# EAGLE board tic_tac_toe (EAGLE 6.3)
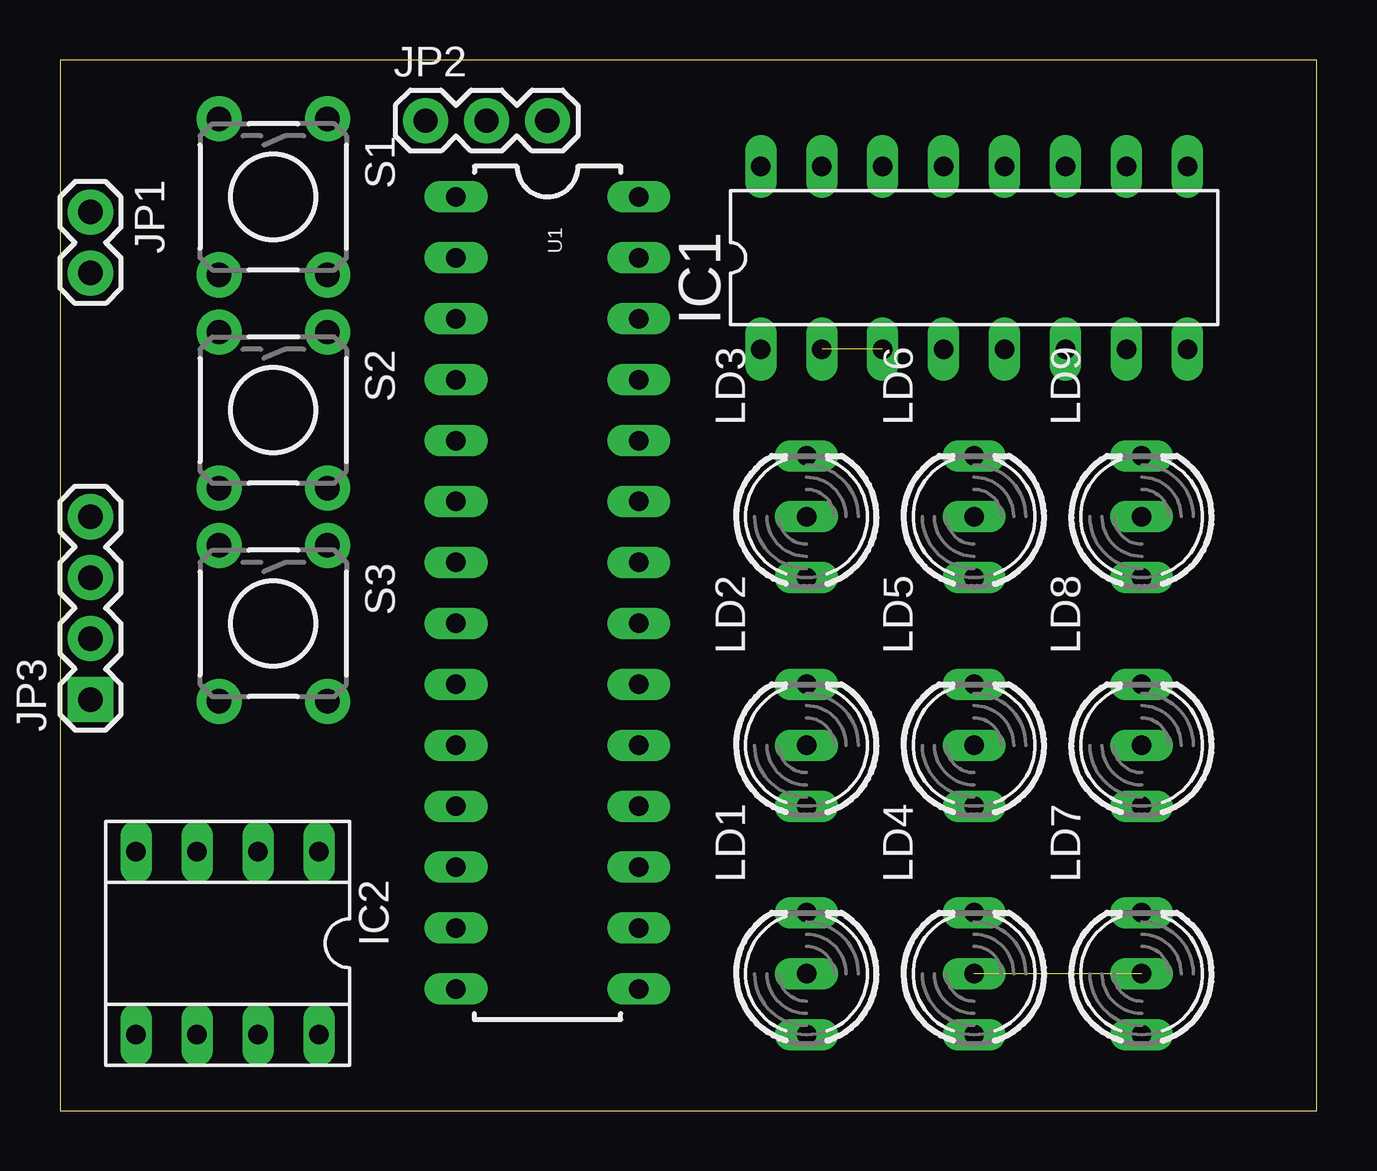
[diagram p0: board, top side]
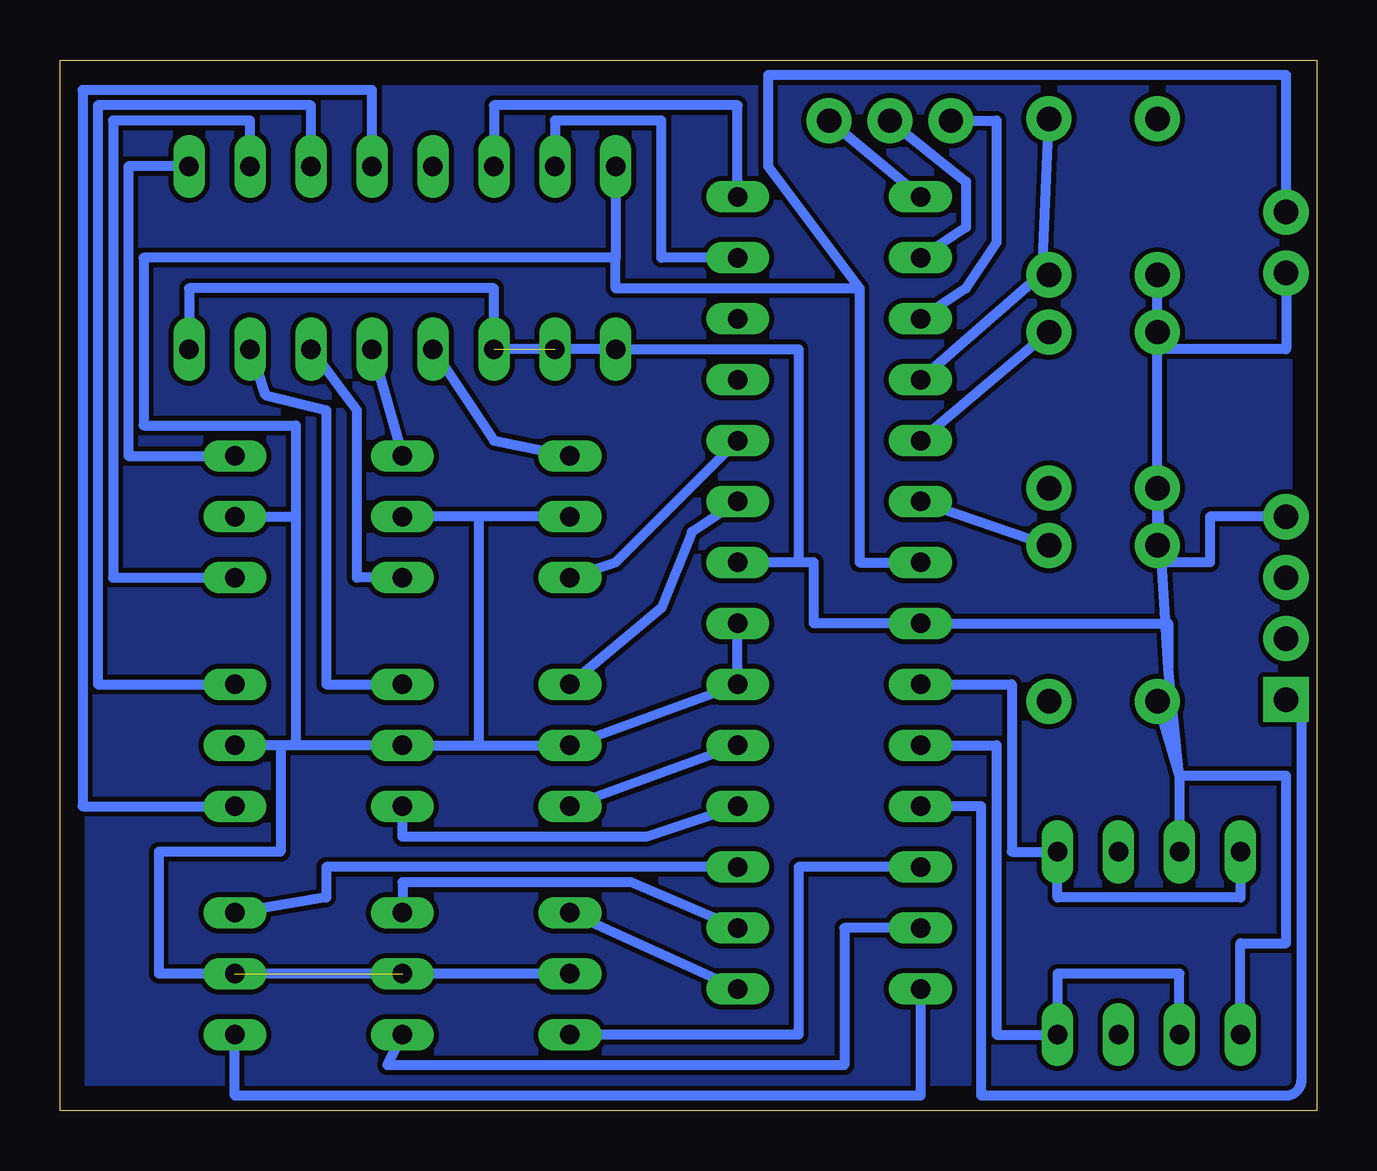
[diagram p1: board, bottom side, seen from below]

Size 52.38 x 43.8 mm. Coordinates in mm from the lower left corner, seen from the top.
Outline: 0,0 52.38,0 52.38,43.8 0,43.8 0,0
Copper layers (1*16): Top 0.035mm / dielectric 1.5mm / Bottom 0.035mm
Design rules "default": minimum track width 10mil, minimum drill 24mil, track to track 8mil, track to pad 8mil, pad to pad 8mil, via to via 8mil, smd to smd 8mil, copper to edge 40mil, drill to drill 8mil, minimum pad ring 10mil, minimum via ring 8mil, stop-mask expansion 4mil, vias tented up to drill 0mil, thermal gap 10mil

## Footprints (pad centres in the part's own frame; a part is rotated, then mirrored left to right if it is on the bottom)
DIL16 = drill 0.813 long: 1 -8.89,-3.81; 2 -6.35,-3.81; 3 -3.81,-3.81; 4 -1.27,-3.81; 5 1.27,-3.81; 6 3.81,-3.81; 7 6.35,-3.81; 8 8.89,-3.81; 9 8.89,3.81; 10 6.35,3.81; 11 3.81,3.81; 12 1.27,3.81; 13 -1.27,3.81; 14 -3.81,3.81; 15 -6.35,3.81; 16 -8.89,3.81
SOCKET-08 = drill 0.813 long: 1 -3.81,-3.81; 2 -1.27,-3.81; 3 1.27,-3.81; 4 3.81,-3.81; 5 3.81,3.81; 6 1.27,3.81; 7 -1.27,3.81; 8 -3.81,3.81
1X02 = drill 1.016 pad 1.88: 1 0,0; 2 2.54,0
1X03 = drill 1.016 pad 1.88: 1 0,0; 2 2.54,0; 3 5.08,0
1X04 = drill 1.016 pad 1.88 square: 1 0,0 | drill 1.016 pad 1.88: 2 2.54,0; 3 5.08,0; 4 7.62,0
DUOLED-C-5MM = drill 0.813 long: AR 2.54,0; AX -2.54,0; C 0,0
TACTILE-PTH = drill 1.016 pad 1.88: 1 -3.251,2.261; 2 3.251,2.261; 3 -3.251,-2.261; 4 3.251,-2.261
DIL28-3 = drill 0.813 long: 1 -16.51,-3.81; 2 -13.97,-3.81; 3 -11.43,-3.81; 4 -8.89,-3.81; 5 -6.35,-3.81; 6 -3.81,-3.81; 7 -1.27,-3.81; 8 1.27,-3.81; 9 3.81,-3.81; 10 6.35,-3.81; 11 8.89,-3.81; 12 11.43,-3.81; 13 13.97,-3.81; 14 16.51,-3.81; 15 16.51,3.81; 16 13.97,3.81; 17 11.43,3.81; 18 8.89,3.81; 19 6.35,3.81; 20 3.81,3.81; 21 1.27,3.81; 22 -1.27,3.81; 23 -3.81,3.81; 24 -6.35,3.81; 25 -8.89,3.81; 26 -11.43,3.81; 27 -13.97,3.81; 28 -16.51,3.81

## Placement (x,y rotation side)
IC1  PCF8574P  [DIL16]  38.1,35.56 0 top
IC2  [SOCKET-08]  6.99,6.99 180 top
JP1  M02PTH  [1X02]  1.27,37.47 270 top
JP2  [1X03]  15.24,41.27 0 top
JP3  [1X04]  1.27,17.14 90 top
LD1  [DUOLED-C-5MM]  31.11,5.71 90 top
LD2  [DUOLED-C-5MM]  31.11,15.24 90 top
LD3  [DUOLED-C-5MM]  31.11,24.77 90 top
LD4  [DUOLED-C-5MM]  38.1,5.71 90 top
LD5  [DUOLED-C-5MM]  38.1,15.24 90 top
LD6  [DUOLED-C-5MM]  38.1,24.77 90 top
LD7  [DUOLED-C-5MM]  45.09,5.71 90 top
LD8  [DUOLED-C-5MM]  45.09,15.24 90 top
LD9  [DUOLED-C-5MM]  45.09,24.77 90 top
S1  [TACTILE-PTH]  8.89,38.1 270 top
S2  [TACTILE-PTH]  8.89,29.21 270 top
S3  [TACTILE-PTH]  8.89,20.32 270 top
U1  ATMEGA328P_PDIP  [DIL28-3]  20.32,21.59 270 top

## Library data of the parts
IC1 = micro-philips; MPN: PCF8574PN; OC_FARNELL: 204020; OC_NEWARK: 11N8515
IC2 = ic-package
JP1-JP3 = SparkFun-Connectors
LD1-LD9 = led
S1-S3 = SparkFun-Electromechanical
U1 = SparkFun-DigitalIC

## Nets
GND: IC1.1 IC1.2 IC1.3 IC1.8 IC2.3 IC2.5 JP1.2 JP3.4 S1.4 S2.4 S3.4 U1.8 U1.22
N$1: S1.1 U1.4
N$2: S2.1 U1.5
N$3: S3.1 U1.6
N$4: IC1.14 U1.28
N$5: IC1.15 U1.27
N$6: JP3.1 U1.11
N$7: JP2.2 U1.2
N$8: JP2.1 U1.3
N$9: JP2.3 U1.1
N$12: IC2.6 IC2.8 U1.10
N$13: IC2.1 IC2.4 U1.9
S$1: LD1.AX U1.12
S$2: LD4.AX U1.13
S$3: LD7.AX U1.14
S$4: LD1.AR U1.15
S$5: LD4.AR U1.16
S$6: LD7.AR U1.17
S$7: LD5.AX U1.18
S$8: LD2.AX U1.19
S$9: LD2.AR U1.23
S$10: LD3.AX U1.24
S$11: IC1.4 LD3.AR
S$12: IC1.5 LD6.AR
S$13: IC1.6 LD6.AX
S$14: IC1.7 LD5.AR
S$15: IC1.9 LD9.AR
S$16: IC1.10 LD9.AX
S$17: IC1.11 LD8.AR
S$18: IC1.12 LD8.AX
VCC: IC1.16 JP1.1 LD1.C LD2.C LD3.C LD4.C LD5.C LD6.C LD7.C LD8.C LD9.C U1.7 U1.20 U1.21

## Tracks (layer width: path | path; a pad name or v marks a point on that pad's centre or on a via)
GND  (1 unrouted)
  Bottom 0.406: 5.71,13.97 1.27,13.97 1.27,6.99 3.17,6.99 IC2.5 | 5.71,13.97 IC2.3 | S3.4 5.71,13.97 | 5.71,13.97 6.18,18.43 | 6.18,18.43 S2.4 | S2.4 S1.4 6.63,31.75 1.27,31.75 JP1.2 | JP3.4 4.45,24.77 4.45,22.86 6.63,22.86 S2.4 | IC1.8 46.99,34.29 34.29,34.29 IC1.3 IC1.1 21.59,31.75 21.59,22.86 | 21.59,22.86 U1.22 24.77,22.86 | 6.18,18.43 6.18,20.32 U1.8 20.95,20.32 20.95,22.86 21.59,22.86
N$1
  Bottom 0.406: U1.4 11.43,34.92 S1.1
N$2
  Bottom 0.406: S2.1 U1.5
N$3
  Bottom 0.406: S3.1 U1.6
N$4
  Bottom 0.406: U1.28 24.13,41.91 34.29,41.91 IC1.14
N$5
  Bottom 0.406: U1.27 27.3,35.56 27.3,41.27 31.75,41.27 IC1.15
N$6
  Bottom 0.406: JP3.1 arc90 0.64,16.51 0.64,1.27 arc90 1.27,0.64 13.97,0.64 13.97,12.7 U1.11
N$7
  Bottom 0.406: JP2.2 14.61,38.73 14.61,36.83 U1.2
N$8
  Bottom 0.406: JP2.1 13.34,41.27 13.34,36.2 14.61,34.29 U1.3
N$9
  Bottom 0.406: U1.1 JP2.3
N$12
  Bottom 0.406: U1.10 13.34,15.24 13.34,3.17 IC2.8 10.79,5.71 5.71,5.71 IC2.6
N$13
  Bottom 0.406: IC2.4 3.17,8.89 10.79,8.89 IC2.1 12.7,10.79 12.7,17.78 U1.9
S$1
  Bottom 0.406: U1.12 21.59,10.16 21.59,3.17 LD1.AX
S$2
  Bottom 0.406: U1.13 19.68,7.62 19.68,1.91 38.73,1.91 LD4.AX
S$3
  Bottom 0.406: U1.14 16.51,0.64 45.09,0.64 LD7.AX
S$4
  Bottom 0.406: U1.15 LD1.AR
S$5
  Bottom 0.406: U1.16 28.57,9.53 38.1,9.53 LD4.AR
S$6
  Bottom 0.406: U1.17 41.27,10.16 41.27,8.89 LD7.AR
S$7
  Bottom 0.406: U1.18 27.94,11.43 38.1,11.43 LD5.AX
S$8
  Bottom 0.406: U1.19 LD2.AX
S$9
  Bottom 0.406: U1.23 26.04,24.13 27.3,20.95 LD2.AR
S$10
  Bottom 0.406: U1.24 29.21,22.86 LD3.AX
S$11
  Bottom 0.406: IC1.4 34.29,27.94 LD3.AR
S$12
  Bottom 0.406: IC1.5 LD6.AR
S$13
  Bottom 0.406: IC1.6 40.01,29.21 40.01,22.23 LD6.AX
S$14
  Bottom 0.406: IC1.7 43.81,29.84 41.27,29.21 41.27,17.78 LD5.AR
S$15
  Bottom 0.406: IC1.9 49.53,39.37 49.53,27.3 LD9.AR
S$16
  Bottom 0.406: IC1.10 44.45,41.27 50.16,41.27 50.16,22.23 LD9.AX
S$17
  Bottom 0.406: IC1.11 41.91,41.91 50.8,41.91 50.8,17.78 LD8.AR
S$18
  Bottom 0.406: IC1.12 39.37,42.55 51.44,42.55 51.44,12.7 LD8.AX
S$19
  pour Bottom: 0,43.81 52.7,43.81 52.7,0 0,0
VCC  (1 unrouted)
  Bottom 0.406: JP1.1 1.27,43.18 22.86,43.18 22.86,39.37 19.05,34.29 | 19.05,34.29 19.05,22.86 U1.7 | IC1.16 29.21,35.56 | 19.05,34.29 29.21,34.29 29.21,35.56 | LD1.C LD7.C 48.26,5.71 48.26,10.79 43.18,10.79 43.18,15.24 | 34.92,15.24 LD5.C 42.55,15.24 | 34.92,15.24 LD2.C U1.20 U1.21 | LD3.C 34.92,24.77 | 34.92,24.77 34.92,15.24 | 34.92,24.77 LD6.C | 42.55,15.24 43.18,15.24 | 43.18,15.24 LD8.C | LD9.C 42.55,24.77 | 29.21,35.56 48.9,35.56 48.9,28.57 42.55,28.57 42.55,24.77 | 42.55,24.77 42.55,15.24